# EAGLE board SparkFun_Venus_GPS_SMA_Connector_Panel_v21 (EAGLE 7.4.0), part 1 of 4
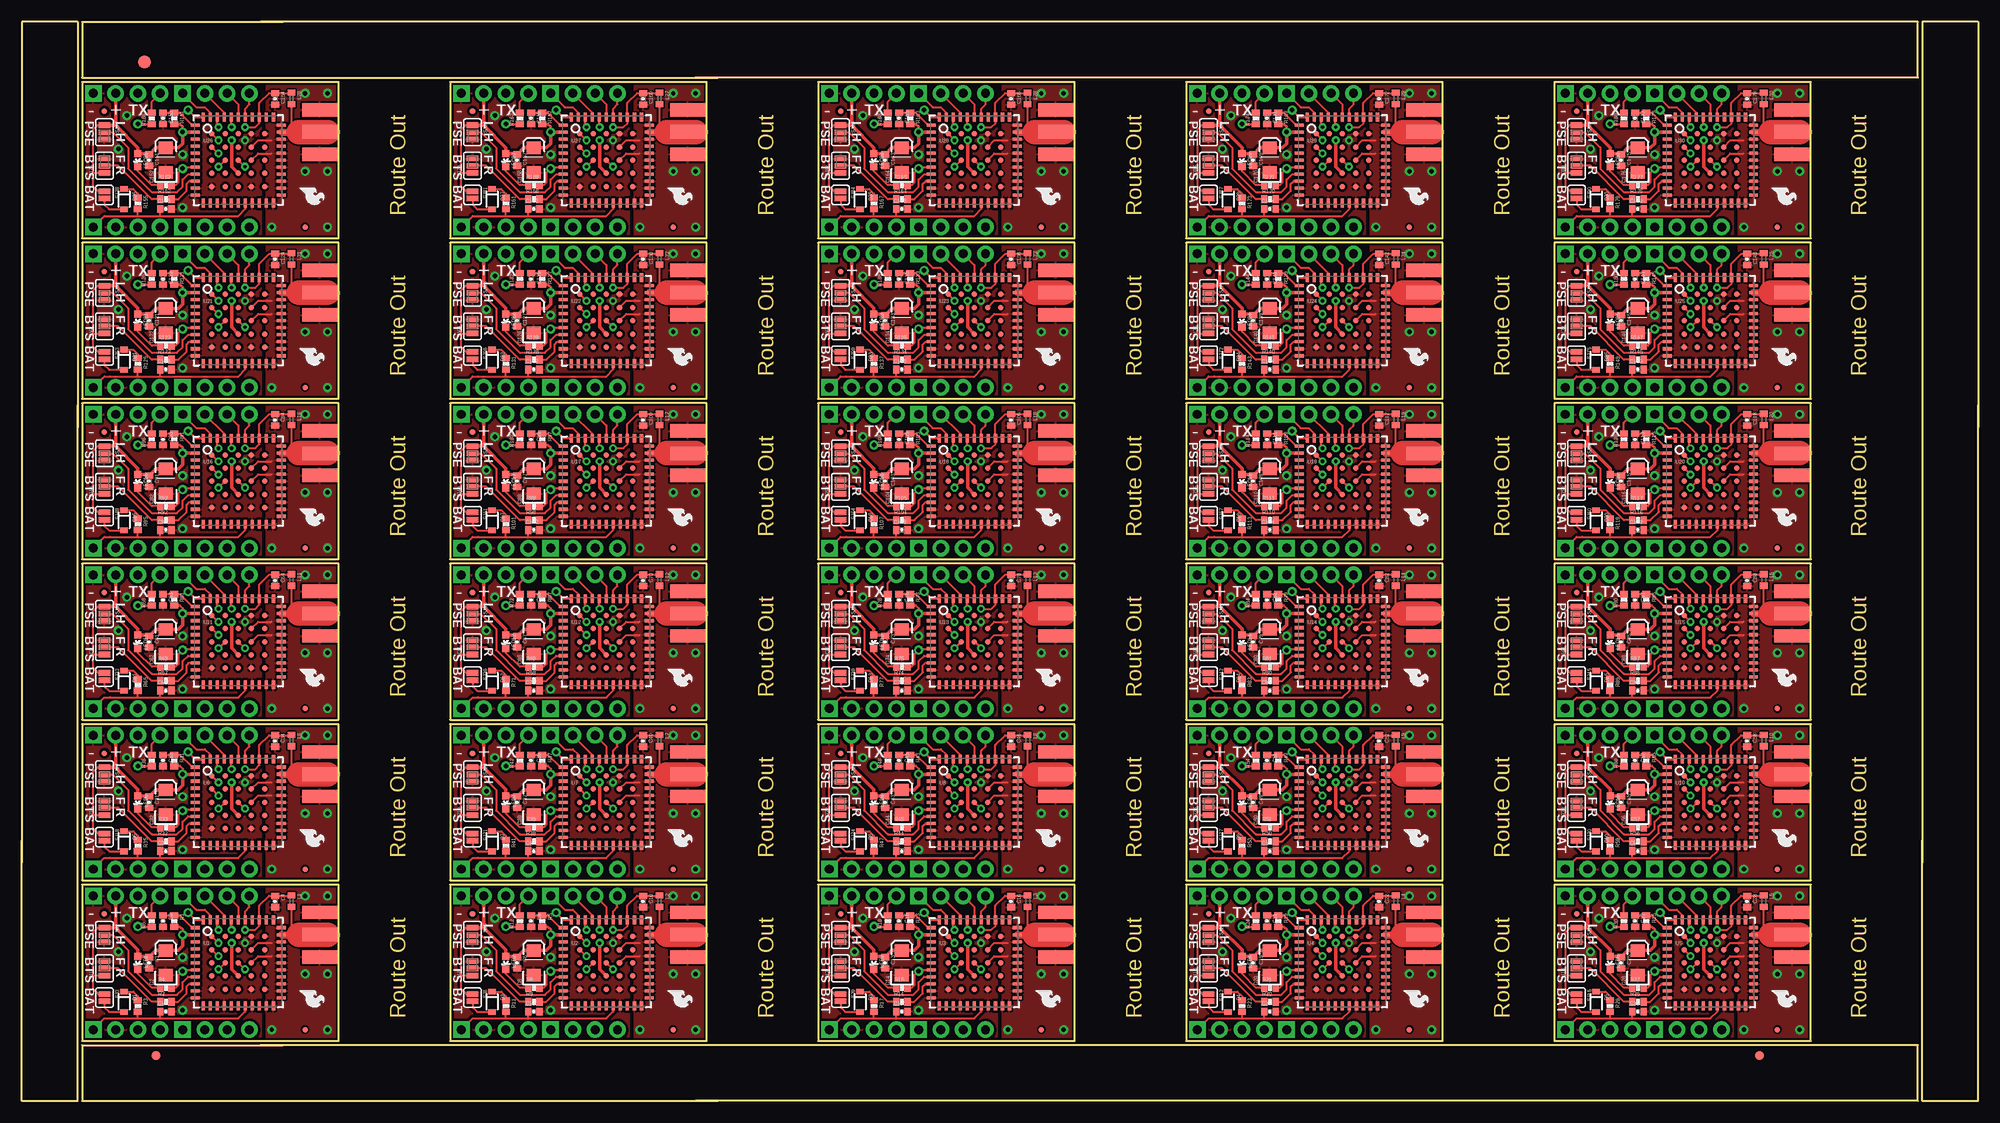
[diagram p0: board, top side]
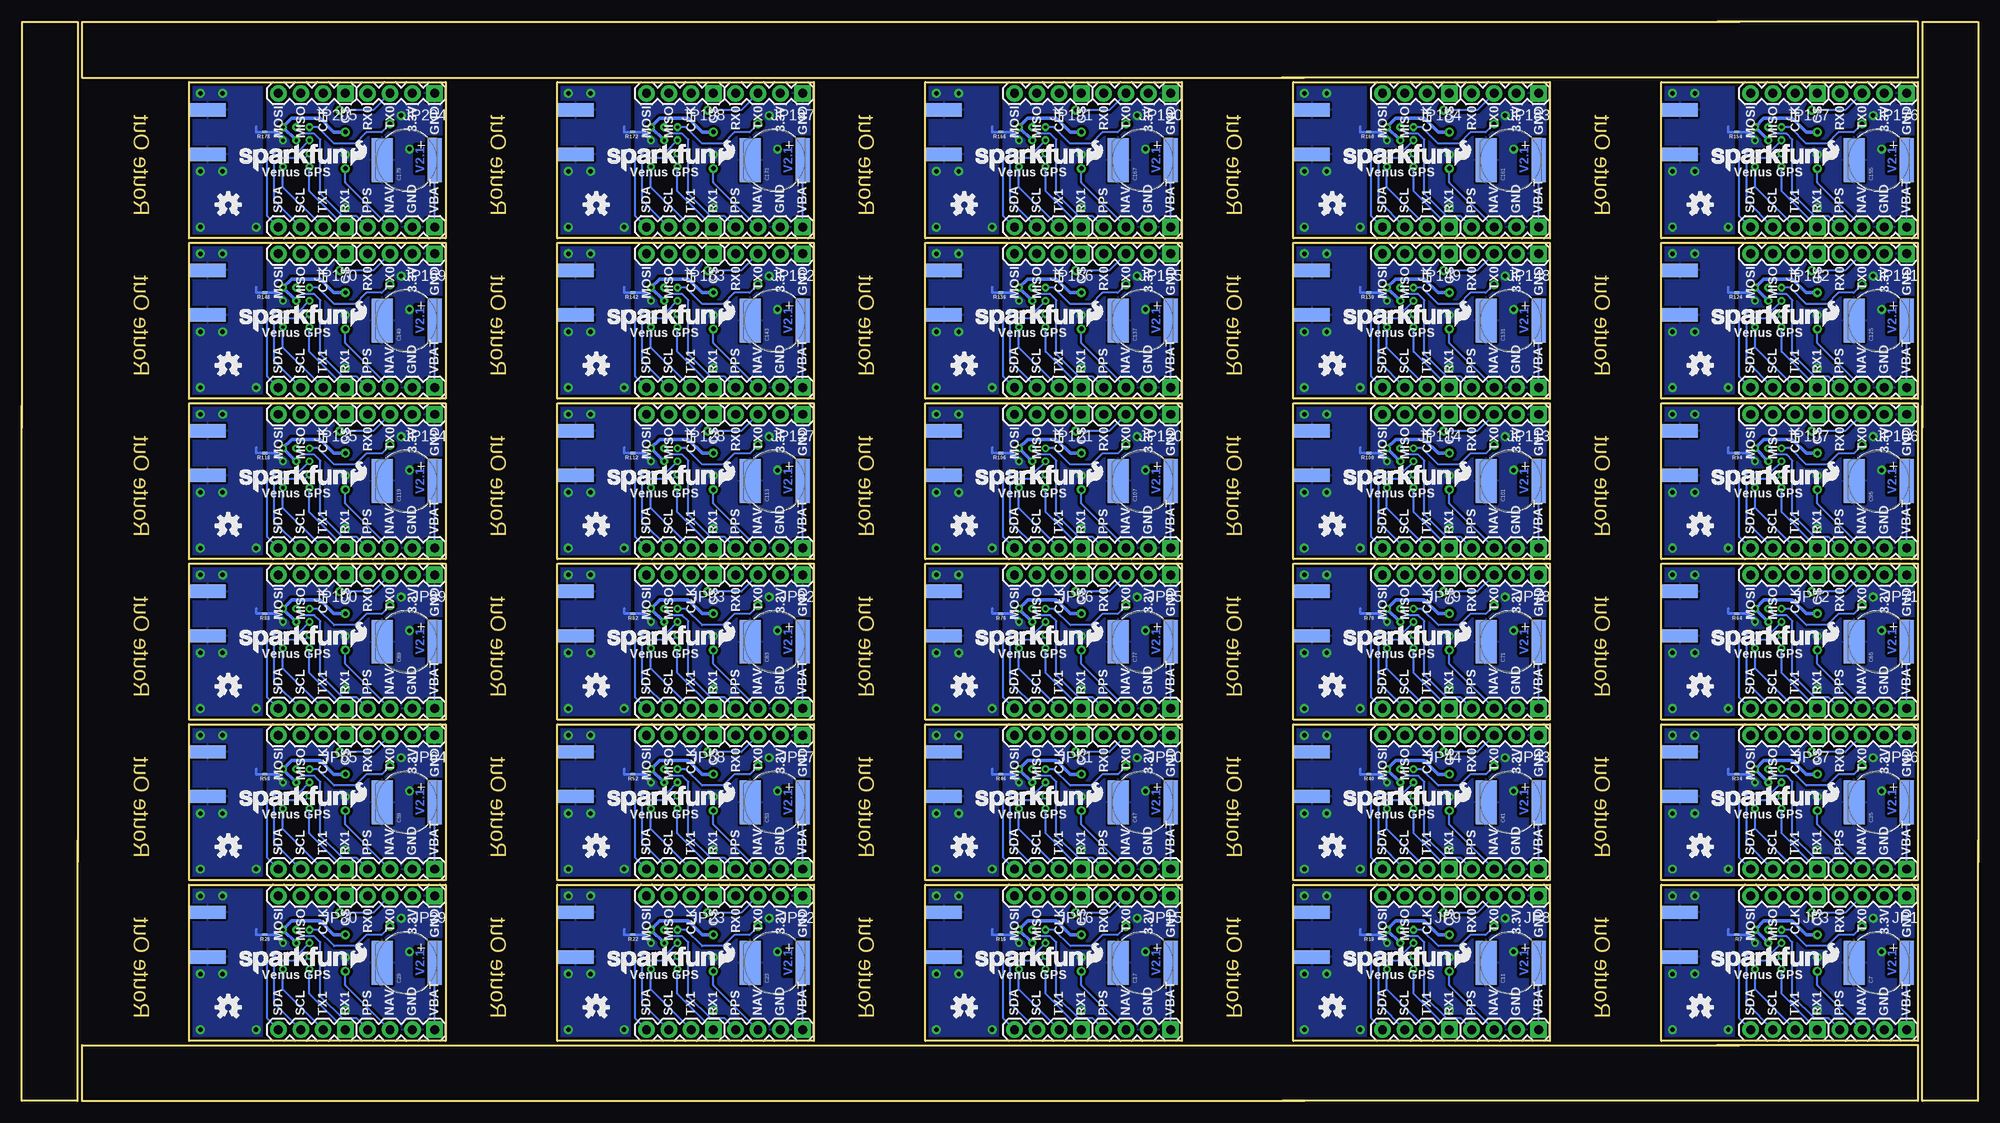
[diagram p1: board, bottom side, seen from below]

Size 222.76 x 122.94 mm. Coordinates in mm from the lower left corner, seen from the top.
Outline: 6.35,79.25 6.35,0 0,0 0,29.72
Outline: 0,27.18 0,122.94 6.35,122.94 6.35,76.71
Outline: 79.25,0 6.86,0 6.86,6.35 29.72,6.35
Outline: 27.18,6.35 215.9,6.35 215.9,0 76.71,0
Outline: 222.76,79.25 222.76,0 216.41,0 216.41,29.72
Outline: 216.41,27.18 216.41,122.94 222.76,122.94 222.76,76.71
Outline: 79.25,116.59 6.86,116.59 6.86,122.94 29.72,122.94
Outline: 27.18,122.94 215.9,122.94 215.9,116.59 76.71,116.59
Outline: 6.86,6.86 36.07,6.86 36.07,24.64 6.86,24.64 6.86,6.86
Outline: 48.77,6.86 77.98,6.86 77.98,24.64 48.77,24.64 48.77,6.86
Outline: 90.68,6.86 119.89,6.86 119.89,24.64 90.68,24.64 90.68,6.86
Outline: 132.59,6.86 161.8,6.86 161.8,24.64 132.59,24.64 132.59,6.86
Outline: 174.5,6.86 203.71,6.86 203.71,24.64 174.5,24.64 174.5,6.86
Outline: 6.86,25.15 36.07,25.15 36.07,42.93 6.86,42.93 6.86,25.15
Outline: 48.77,25.15 77.98,25.15 77.98,42.93 48.77,42.93 48.77,25.15
Outline: 90.68,25.15 119.89,25.15 119.89,42.93 90.68,42.93 90.68,25.15
Outline: 132.59,25.15 161.8,25.15 161.8,42.93 132.59,42.93 132.59,25.15
Outline: 174.5,25.15 203.71,25.15 203.71,42.93 174.5,42.93 174.5,25.15
Outline: 6.86,43.43 36.07,43.43 36.07,61.21 6.86,61.21 6.86,43.43
Outline: 48.77,43.43 77.98,43.43 77.98,61.21 48.77,61.21 48.77,43.43
Outline: 90.68,43.43 119.89,43.43 119.89,61.21 90.68,61.21 90.68,43.43
Outline: 132.59,43.43 161.8,43.43 161.8,61.21 132.59,61.21 132.59,43.43
Outline: 174.5,43.43 203.71,43.43 203.71,61.21 174.5,61.21 174.5,43.43
Outline: 6.86,61.72 36.07,61.72 36.07,79.5 6.86,79.5 6.86,61.72
Outline: 48.77,61.72 77.98,61.72 77.98,79.5 48.77,79.5 48.77,61.72
Outline: 90.68,61.72 119.89,61.72 119.89,79.5 90.68,79.5 90.68,61.72
Outline: 132.59,61.72 161.8,61.72 161.8,79.5 132.59,79.5 132.59,61.72
Outline: 174.5,61.72 203.71,61.72 203.71,79.5 174.5,79.5 174.5,61.72
Outline: 6.86,80.01 36.07,80.01 36.07,97.79 6.86,97.79 6.86,80.01
Outline: 48.77,80.01 77.98,80.01 77.98,97.79 48.77,97.79 48.77,80.01
Outline: 90.68,80.01 119.89,80.01 119.89,97.79 90.68,97.79 90.68,80.01
Outline: 132.59,80.01 161.8,80.01 161.8,97.79 132.59,97.79 132.59,80.01
Outline: 174.5,80.01 203.71,80.01 203.71,97.79 174.5,97.79 174.5,80.01
Outline: 6.86,98.3 36.07,98.3 36.07,116.08 6.86,116.08 6.86,98.3
Outline: 48.77,98.3 77.98,98.3 77.98,116.08 48.77,116.08 48.77,98.3
Outline: 90.68,98.3 119.89,98.3 119.89,116.08 90.68,116.08 90.68,98.3
Outline: 132.59,98.3 161.8,98.3 161.8,116.08 132.59,116.08 132.59,98.3
Outline: 174.5,98.3 203.71,98.3 203.71,116.08 174.5,116.08 174.5,98.3
Copper layers (1*16): Top 0.035mm / dielectric 1.5mm / Bottom 0.035mm
Design rules "SparkFun-2-layer": minimum track width 7mil, minimum drill 15mil, track to track 8mil, track to pad 8mil, pad to pad 8mil, via to via 8mil, smd to smd 8mil, copper to edge 8mil, drill to drill 8mil, minimum pad ring 12mil, minimum via ring 10mil, stop-mask expansion 4mil, vias tented up to drill 20mil, thermal gap 10mil

## Footprints (pad centres in the part's own frame; a part is rotated, then mirrored left to right if it is on the bottom)
0402-CAP = smd 0.7 x 0.9: 1 -0.65,0; 2 0.65,0
EIA3216 = smd 1.4 x 1.6: A 1.4,0; C -1.4,0
EN_J2 = smd 5 x 1.6: + 0,-3.2 | smd 5 x 2.4: - 0,2.8
SOD-323 = smd 0.63 x 0.83: 1 -1.15,0; 2 1.15,0
FIDUCIAL-1.5X3 = smd 1.5 x 1.5: 1 0,0
FIDUCIAL-1X2 = smd 1 x 1: 1 0,0
1X04 = drill 1.016 pad 1.88 square: 1 0,0 | drill 1.016 pad 1.88: 2 2.54,0; 3 5.08,0; 4 7.62,0
SMA-EDGE = smd 1.524 x 4.064: GND@0 0,0; GND@1 5.08,0; SIG 2.54,0 | smd 1.524 x 4.064 bottom: GND@2 0,0; GND@3 5.08,0
MICRO-FIDUCIAL = smd 0.635 x 0.635: 1 0,0
C0402 = smd 0.7 x 0.9: 1 -0.65,0; 2 0.65,0
LED-0603 = smd 0.8 x 0.8: A 0,-0.75; C 0,0.75
0402-RES = smd 0.7 x 0.9: 1 -0.65,0; 2 0.65,0
GND-JUMP = smd 0.305 x 0.305: 1 -0.133,0; 2 0.133,0
SJ_3_PASTE2&3 = smd 0.635 x 1.27: 1 -0.813,0; 2 0,0; 3 0.813,0
SJ_2S = smd 0.635 x 1.27: 1 -0.412,0; 2 0.412,0
VENUS638FLPX = smd 1 x 0.36: 1 -4.9,4; 2 -4.9,3.2; 3 -4.9,2.4; 4 -4.9,1.6; 5 -4.9,0.8; 6 -4.9,0; 7 -4.9,-0.8; 8 -4.9,-1.6; 9 -4.9,-2.4; 10 -4.9,-3.2; 11 -4.9,-4; 23 4.9,-4; 24 4.9,-3.2; 25 4.9,-2.4; 26 4.9,-1.6; 27 4.9,-0.8; 28 4.9,0; 29 4.9,0.8; 30 4.9,1.6; 31 4.9,2.4; 32 4.9,3.2; 33 4.9,4 | smd 0.36 x 1: 12 -4,-4.9; 13 -3.2,-4.9; 14 -2.4,-4.9; 15 -1.6,-4.9; 16 -0.8,-4.9; 17 0,-4.9; 18 0.8,-4.9; 19 1.6,-4.9; 20 2.4,-4.9; 21 3.2,-4.9; 22 4,-4.9; 34 4,4.9; 35 3.2,4.9; 36 2.4,4.9; 37 1.6,4.9; 38 0.8,4.9; 39 0,4.9; 40 -0.8,4.9; 41 -1.6,4.9; 42 -2.4,4.9; 43 -3.2,4.9; 44 -4,4.9 | smd 0.6 x 0.6: 45 -3,3; 46 -3,1.5; 47 -3,0; 48 -3,-1.5; 49 -3,-3; 50 -1.5,3; 51 -1.5,1.5; 52 -1.5,0; 53 -1.5,-1.5; 54 -1.5,-3; 55 0,3; 56 0,1.5; 57 0,0; 58 0,-1.5; 59 0,-3; 60 1.5,3; 61 1.5,1.5; 62 1.5,0; 63 1.5,-1.5; 64 1.5,-3; 65 3,3; 66 3,1.5; 67 3,0; 68 3,-1.5; 69 3,-3

## Placement (x,y rotation side)
C1  0.1uF  [0402-CAP]  14.48,15.75 270 top
C2  10uF  [EIA3216]  16.38,15.75 90 top
C3  1uF  [0402-CAP]  16.07,20.51 270 top
C4  22pF  [0402-CAP]  28.83,22.73 270 top
C5  0.1uF  [0402-CAP]  16.38,10.19 0 top
C6  0.1uF  [0402-CAP]  56.39,15.75 270 top
C7  DNP  [EN_J2]  11.3,15.75 90 bottom
C8  10uF  [EIA3216]  58.29,15.75 90 top
C9  1uF  [0402-CAP]  57.98,20.51 270 top
C10  22pF  [0402-CAP]  70.74,22.73 270 top
C11  DNP  [EN_J2]  53.21,15.75 90 bottom
C12  0.1uF  [0402-CAP]  58.29,10.19 0 top
C13  0.1uF  [0402-CAP]  98.3,15.75 270 top
C14  10uF  [EIA3216]  100.2,15.75 90 top
C15  1uF  [0402-CAP]  99.89,20.51 270 top
C16  22pF  [0402-CAP]  112.65,22.73 270 top
C17  DNP  [EN_J2]  95.12,15.75 90 bottom
C18  0.1uF  [0402-CAP]  100.2,10.19 0 top
C19  0.1uF  [0402-CAP]  140.21,15.75 270 top
C20  10uF  [EIA3216]  142.11,15.75 90 top
C21  1uF  [0402-CAP]  141.8,20.51 270 top
C22  22pF  [0402-CAP]  154.56,22.73 270 top
C23  DNP  [EN_J2]  137.03,15.75 90 bottom
C24  0.1uF  [0402-CAP]  142.11,10.19 0 top
C25  0.1uF  [0402-CAP]  182.12,15.75 270 top
C26  10uF  [EIA3216]  184.02,15.75 90 top
C27  1uF  [0402-CAP]  183.71,20.51 270 top
C28  22pF  [0402-CAP]  196.47,22.73 270 top
C29  DNP  [EN_J2]  178.94,15.75 90 bottom
C30  0.1uF  [0402-CAP]  184.02,10.19 0 top
C31  0.1uF  [0402-CAP]  14.48,34.04 270 top
C32  10uF  [EIA3216]  16.38,34.04 90 top
C33  1uF  [0402-CAP]  16.07,38.8 270 top
C34  22pF  [0402-CAP]  28.83,41.02 270 top
C35  DNP  [EN_J2]  11.3,34.04 90 bottom
C36  0.1uF  [0402-CAP]  16.38,28.48 0 top
C37  0.1uF  [0402-CAP]  56.39,34.04 270 top
C38  10uF  [EIA3216]  58.29,34.04 90 top
C39  1uF  [0402-CAP]  57.98,38.8 270 top
C40  22pF  [0402-CAP]  70.74,41.02 270 top
C41  DNP  [EN_J2]  53.21,34.04 90 bottom
C42  0.1uF  [0402-CAP]  58.29,28.48 0 top
C43  0.1uF  [0402-CAP]  98.3,34.04 270 top
C44  10uF  [EIA3216]  100.2,34.04 90 top
C45  1uF  [0402-CAP]  99.89,38.8 270 top
C46  22pF  [0402-CAP]  112.65,41.02 270 top
C47  DNP  [EN_J2]  95.12,34.04 90 bottom
C48  0.1uF  [0402-CAP]  100.2,28.48 0 top
C49  0.1uF  [0402-CAP]  140.21,34.04 270 top
C50  10uF  [EIA3216]  142.11,34.04 90 top
C51  1uF  [0402-CAP]  141.8,38.8 270 top
C52  22pF  [0402-CAP]  154.56,41.02 270 top
C53  DNP  [EN_J2]  137.03,34.04 90 bottom
C54  0.1uF  [0402-CAP]  142.11,28.48 0 top
C55  0.1uF  [0402-CAP]  182.12,34.04 270 top
C56  10uF  [EIA3216]  184.02,34.04 90 top
C57  1uF  [0402-CAP]  183.71,38.8 270 top
C58  22pF  [0402-CAP]  196.47,41.02 270 top
C59  DNP  [EN_J2]  178.94,34.04 90 bottom
C60  0.1uF  [0402-CAP]  184.02,28.48 0 top
C61  0.1uF  [0402-CAP]  14.48,52.32 270 top
C62  10uF  [EIA3216]  16.38,52.32 90 top
C63  1uF  [0402-CAP]  16.07,57.09 270 top
C64  22pF  [0402-CAP]  28.83,59.31 270 top
C65  DNP  [EN_J2]  11.3,52.32 90 bottom
C66  0.1uF  [0402-CAP]  16.38,46.77 0 top
C67  0.1uF  [0402-CAP]  56.39,52.32 270 top
C68  10uF  [EIA3216]  58.29,52.32 90 top
C69  1uF  [0402-CAP]  57.98,57.09 270 top
C70  22pF  [0402-CAP]  70.74,59.31 270 top
C71  DNP  [EN_J2]  53.21,52.32 90 bottom
C72  0.1uF  [0402-CAP]  58.29,46.77 0 top
C73  0.1uF  [0402-CAP]  98.3,52.32 270 top
C74  10uF  [EIA3216]  100.2,52.32 90 top
C75  1uF  [0402-CAP]  99.89,57.09 270 top
C76  22pF  [0402-CAP]  112.65,59.31 270 top
C77  DNP  [EN_J2]  95.12,52.32 90 bottom
C78  0.1uF  [0402-CAP]  100.2,46.77 0 top
C79  0.1uF  [0402-CAP]  140.21,52.32 270 top
C80  10uF  [EIA3216]  142.11,52.32 90 top
C81  1uF  [0402-CAP]  141.8,57.09 270 top
C82  22pF  [0402-CAP]  154.56,59.31 270 top
C83  DNP  [EN_J2]  137.03,52.32 90 bottom
C84  0.1uF  [0402-CAP]  142.11,46.77 0 top
C85  0.1uF  [0402-CAP]  182.12,52.32 270 top
C86  10uF  [EIA3216]  184.02,52.32 90 top
C87  1uF  [0402-CAP]  183.71,57.09 270 top
C88  22pF  [0402-CAP]  196.47,59.31 270 top
C89  DNP  [EN_J2]  178.94,52.32 90 bottom
C90  0.1uF  [0402-CAP]  184.02,46.77 0 top
C91  0.1uF  [0402-CAP]  14.48,70.61 270 top
C92  10uF  [EIA3216]  16.38,70.61 90 top
C93  1uF  [0402-CAP]  16.07,75.37 270 top
C94  22pF  [0402-CAP]  28.83,77.6 270 top
C95  DNP  [EN_J2]  11.3,70.61 90 bottom
C96  0.1uF  [0402-CAP]  16.38,65.06 0 top
C97  0.1uF  [0402-CAP]  56.39,70.61 270 top
C98  10uF  [EIA3216]  58.29,70.61 90 top
C99  1uF  [0402-CAP]  57.98,75.37 270 top
C100  22pF  [0402-CAP]  70.74,77.6 270 top
C101  DNP  [EN_J2]  53.21,70.61 90 bottom
C102  0.1uF  [0402-CAP]  58.29,65.06 0 top
C103  0.1uF  [0402-CAP]  98.3,70.61 270 top
C104  10uF  [EIA3216]  100.2,70.61 90 top
C105  1uF  [0402-CAP]  99.89,75.37 270 top
C106  22pF  [0402-CAP]  112.65,77.6 270 top
C107  DNP  [EN_J2]  95.12,70.61 90 bottom
C108  0.1uF  [0402-CAP]  100.2,65.06 0 top
C109  0.1uF  [0402-CAP]  140.21,70.61 270 top
C110  10uF  [EIA3216]  142.11,70.61 90 top
C111  1uF  [0402-CAP]  141.8,75.37 270 top
C112  22pF  [0402-CAP]  154.56,77.6 270 top
C113  DNP  [EN_J2]  137.03,70.61 90 bottom
C114  0.1uF  [0402-CAP]  142.11,65.06 0 top
C115  0.1uF  [0402-CAP]  182.12,70.61 270 top
C116  10uF  [EIA3216]  184.02,70.61 90 top
C117  1uF  [0402-CAP]  183.71,75.37 270 top
C118  22pF  [0402-CAP]  196.47,77.6 270 top
C119  DNP  [EN_J2]  178.94,70.61 90 bottom
C120  0.1uF  [0402-CAP]  184.02,65.06 0 top
C121  0.1uF  [0402-CAP]  14.48,88.9 270 top
C122  10uF  [EIA3216]  16.38,88.9 90 top
C123  1uF  [0402-CAP]  16.07,93.66 270 top
C124  22pF  [0402-CAP]  28.83,95.89 270 top
C125  DNP  [EN_J2]  11.3,88.9 90 bottom
C126  0.1uF  [0402-CAP]  16.38,83.34 0 top
C127  0.1uF  [0402-CAP]  56.39,88.9 270 top
C128  10uF  [EIA3216]  58.29,88.9 90 top
C129  1uF  [0402-CAP]  57.98,93.66 270 top
C130  22pF  [0402-CAP]  70.74,95.89 270 top
C131  DNP  [EN_J2]  53.21,88.9 90 bottom
C132  0.1uF  [0402-CAP]  58.29,83.34 0 top
C133  0.1uF  [0402-CAP]  98.3,88.9 270 top
C134  10uF  [EIA3216]  100.2,88.9 90 top
C135  1uF  [0402-CAP]  99.89,93.66 270 top
C136  22pF  [0402-CAP]  112.65,95.89 270 top
C137  DNP  [EN_J2]  95.12,88.9 90 bottom
C138  0.1uF  [0402-CAP]  100.2,83.34 0 top
C139  0.1uF  [0402-CAP]  140.21,88.9 270 top
C140  10uF  [EIA3216]  142.11,88.9 90 top
C141  1uF  [0402-CAP]  141.8,93.66 270 top
C142  22pF  [0402-CAP]  154.56,95.89 270 top
C143  DNP  [EN_J2]  137.03,88.9 90 bottom
C144  0.1uF  [0402-CAP]  142.11,83.34 0 top
C145  0.1uF  [0402-CAP]  182.12,88.9 270 top
C146  10uF  [EIA3216]  184.02,88.9 90 top
C147  1uF  [0402-CAP]  183.71,93.66 270 top
C148  22pF  [0402-CAP]  196.47,95.89 270 top
C149  DNP  [EN_J2]  178.94,88.9 90 bottom
C150  0.1uF  [0402-CAP]  184.02,83.34 0 top
C151  0.1uF  [0402-CAP]  14.48,107.19 270 top
C152  10uF  [EIA3216]  16.38,107.19 90 top
C153  1uF  [0402-CAP]  16.07,111.95 270 top
C154  22pF  [0402-CAP]  28.83,114.17 270 top
C155  DNP  [EN_J2]  11.3,107.19 90 bottom
C156  0.1uF  [0402-CAP]  16.38,101.63 0 top
C157  0.1uF  [0402-CAP]  56.39,107.19 270 top
C158  10uF  [EIA3216]  58.29,107.19 90 top
C159  1uF  [0402-CAP]  57.98,111.95 270 top
C160  22pF  [0402-CAP]  70.74,114.17 270 top
C161  DNP  [EN_J2]  53.21,107.19 90 bottom
C162  0.1uF  [0402-CAP]  58.29,101.63 0 top
C163  0.1uF  [0402-CAP]  98.3,107.19 270 top
C164  10uF  [EIA3216]  100.2,107.19 90 top
C165  1uF  [0402-CAP]  99.89,111.95 270 top
C166  22pF  [0402-CAP]  112.65,114.17 270 top
C167  DNP  [EN_J2]  95.12,107.19 90 bottom
C168  0.1uF  [0402-CAP]  100.2,101.63 0 top
C169  0.1uF  [0402-CAP]  140.21,107.19 270 top
C170  10uF  [EIA3216]  142.11,107.19 90 top
C171  1uF  [0402-CAP]  141.8,111.95 270 top
C172  22pF  [0402-CAP]  154.56,114.17 270 top
C173  DNP  [EN_J2]  137.03,107.19 90 bottom
C174  0.1uF  [0402-CAP]  142.11,101.63 0 top
C175  0.1uF  [0402-CAP]  182.12,107.19 270 top
C176  10uF  [EIA3216]  184.02,107.19 90 top
C177  1uF  [0402-CAP]  183.71,111.95 270 top
C178  22pF  [0402-CAP]  196.47,114.17 270 top
C179  DNP  [EN_J2]  178.94,107.19 90 bottom
C180  0.1uF  [0402-CAP]  184.02,101.63 0 top
D1  BAS16  [SOD-323]  11.62,11.3 270 top
D2  BAS16  [SOD-323]  53.53,11.3 270 top
D3  BAS16  [SOD-323]  95.44,11.3 270 top
D4  BAS16  [SOD-323]  137.35,11.3 270 top
D5  BAS16  [SOD-323]  179.26,11.3 270 top
D6  BAS16  [SOD-323]  11.62,29.59 270 top
D7  BAS16  [SOD-323]  53.53,29.59 270 top
D8  BAS16  [SOD-323]  95.44,29.59 270 top
D9  BAS16  [SOD-323]  137.35,29.59 270 top
D10  BAS16  [SOD-323]  179.26,29.59 270 top
D11  BAS16  [SOD-323]  11.62,47.88 270 top
D12  BAS16  [SOD-323]  53.53,47.88 270 top
D13  BAS16  [SOD-323]  95.44,47.88 270 top
D14  BAS16  [SOD-323]  137.35,47.88 270 top
D15  BAS16  [SOD-323]  179.26,47.88 270 top
D16  BAS16  [SOD-323]  11.62,66.17 270 top
D17  BAS16  [SOD-323]  53.53,66.17 270 top
D18  BAS16  [SOD-323]  95.44,66.17 270 top
D19  BAS16  [SOD-323]  137.35,66.17 270 top
D20  BAS16  [SOD-323]  179.26,66.17 270 top
D21  BAS16  [SOD-323]  11.62,84.45 270 top
D22  BAS16  [SOD-323]  53.53,84.45 270 top
D23  BAS16  [SOD-323]  95.44,84.45 270 top
D24  BAS16  [SOD-323]  137.35,84.45 270 top
D25  BAS16  [SOD-323]  179.26,84.45 270 top
D26  BAS16  [SOD-323]  11.62,102.74 270 top
D27  BAS16  [SOD-323]  53.53,102.74 270 top
D28  BAS16  [SOD-323]  95.44,102.74 270 top
D29  BAS16  [SOD-323]  137.35,102.74 270 top
D30  BAS16  [SOD-323]  179.26,102.74 270 top
E$1  [FIDUCIAL-1.5X3]  13.97,118.36 0 top
E$3  [FIDUCIAL-1X2]  15.24,5.21 270 top
E$4  [FIDUCIAL-1X2]  197.87,5.21 90 top
JP1  MAIN  [1X04]  8.13,23.37 180 bottom
JP2  MISC  [1X04]  8.13,8.13 180 bottom
JP3  SPI  [1X04]  18.29,23.37 180 bottom
JP4  AUX  [1X04]  18.29,8.13 180 bottom
JP5  SMA_EDGE  [SMA-EDGE]  33.93,16.41 90 top
JP6  FIDUCIALUFIDUCIAL  [MICRO-FIDUCIAL]  32.26,8.13 0 top
JP7  FIDUCIALUFIDUCIAL  [MICRO-FIDUCIAL]  9.4,21.34 0 top
JP8  MAIN  [1X04]  50.04,23.37 180 bottom
JP9  SPI  [1X04]  60.2,23.37 180 bottom
JP10  SMA_EDGE  [SMA-EDGE]  75.84,16.41 90 top
JP11  AUX  [1X04]  60.2,8.13 180 bottom
JP12  MISC  [1X04]  50.04,8.13 180 bottom
JP13  FIDUCIALUFIDUCIAL  [MICRO-FIDUCIAL]  74.17,8.13 0 top
JP14  FIDUCIALUFIDUCIAL  [MICRO-FIDUCIAL]  51.31,21.34 0 top
JP15  MAIN  [1X04]  91.95,23.37 180 bottom
JP16  SPI  [1X04]  102.11,23.37 180 bottom
JP17  SMA_EDGE  [SMA-EDGE]  117.75,16.41 90 top
JP18  AUX  [1X04]  102.11,8.13 180 bottom
JP19  MISC  [1X04]  91.95,8.13 180 bottom
JP20  FIDUCIALUFIDUCIAL  [MICRO-FIDUCIAL]  116.08,8.13 0 top
JP21  FIDUCIALUFIDUCIAL  [MICRO-FIDUCIAL]  93.22,21.34 0 top
JP22  MAIN  [1X04]  133.86,23.37 180 bottom
JP23  SPI  [1X04]  144.02,23.37 180 bottom
JP24  SMA_EDGE  [SMA-EDGE]  159.66,16.41 90 top
JP25  AUX  [1X04]  144.02,8.13 180 bottom
JP26  MISC  [1X04]  133.86,8.13 180 bottom
JP27  FIDUCIALUFIDUCIAL  [MICRO-FIDUCIAL]  157.99,8.13 0 top
JP28  FIDUCIALUFIDUCIAL  [MICRO-FIDUCIAL]  135.13,21.34 0 top
JP29  MAIN  [1X04]  175.77,23.37 180 bottom
JP30  SPI  [1X04]  185.93,23.37 180 bottom
JP31  SMA_EDGE  [SMA-EDGE]  201.57,16.41 90 top
JP32  AUX  [1X04]  185.93,8.13 180 bottom
JP33  MISC  [1X04]  175.77,8.13 180 bottom
JP34  FIDUCIALUFIDUCIAL  [MICRO-FIDUCIAL]  199.9,8.13 0 top
JP35  FIDUCIALUFIDUCIAL  [MICRO-FIDUCIAL]  177.04,21.34 0 top
JP36  MAIN  [1X04]  8.13,41.66 180 bottom
JP37  SPI  [1X04]  18.29,41.66 180 bottom
JP38  SMA_EDGE  [SMA-EDGE]  33.93,34.7 90 top
JP39  AUX  [1X04]  18.29,26.42 180 bottom
JP40  MISC  [1X04]  8.13,26.42 180 bottom
JP41  FIDUCIALUFIDUCIAL  [MICRO-FIDUCIAL]  32.26,26.42 0 top
JP42  FIDUCIALUFIDUCIAL  [MICRO-FIDUCIAL]  9.4,39.62 0 top
JP43  MAIN  [1X04]  50.04,41.66 180 bottom
JP44  SPI  [1X04]  60.2,41.66 180 bottom
JP45  SMA_EDGE  [SMA-EDGE]  75.84,34.7 90 top
JP46  AUX  [1X04]  60.2,26.42 180 bottom
JP47  MISC  [1X04]  50.04,26.42 180 bottom
JP48  FIDUCIALUFIDUCIAL  [MICRO-FIDUCIAL]  74.17,26.42 0 top
JP49  FIDUCIALUFIDUCIAL  [MICRO-FIDUCIAL]  51.31,39.62 0 top
JP50  MAIN  [1X04]  91.95,41.66 180 bottom
JP51  SPI  [1X04]  102.11,41.66 180 bottom
JP52  SMA_EDGE  [SMA-EDGE]  117.75,34.7 90 top
JP53  AUX  [1X04]  102.11,26.42 180 bottom
JP54  MISC  [1X04]  91.95,26.42 180 bottom
JP55  FIDUCIALUFIDUCIAL  [MICRO-FIDUCIAL]  116.08,26.42 0 top
JP56  FIDUCIALUFIDUCIAL  [MICRO-FIDUCIAL]  93.22,39.62 0 top
JP57  MAIN  [1X04]  133.86,41.66 180 bottom
JP58  SPI  [1X04]  144.02,41.66 180 bottom
JP59  SMA_EDGE  [SMA-EDGE]  159.66,34.7 90 top
JP60  AUX  [1X04]  144.02,26.42 180 bottom
JP61  MISC  [1X04]  133.86,26.42 180 bottom
JP62  FIDUCIALUFIDUCIAL  [MICRO-FIDUCIAL]  157.99,26.42 0 top
JP63  FIDUCIALUFIDUCIAL  [MICRO-FIDUCIAL]  135.13,39.62 0 top
JP64  MAIN  [1X04]  175.77,41.66 180 bottom
JP65  SPI  [1X04]  185.93,41.66 180 bottom
JP66  SMA_EDGE  [SMA-EDGE]  201.57,34.7 90 top
JP67  AUX  [1X04]  185.93,26.42 180 bottom
JP68  MISC  [1X04]  175.77,26.42 180 bottom
JP69  FIDUCIALUFIDUCIAL  [MICRO-FIDUCIAL]  199.9,26.42 0 top
JP70  FIDUCIALUFIDUCIAL  [MICRO-FIDUCIAL]  177.04,39.62 0 top
JP71  MAIN  [1X04]  8.13,59.94 180 bottom
JP72  SPI  [1X04]  18.29,59.94 180 bottom
JP73  SMA_EDGE  [SMA-EDGE]  33.93,52.98 90 top
JP74  AUX  [1X04]  18.29,44.7 180 bottom
JP75  MISC  [1X04]  8.13,44.7 180 bottom
JP76  FIDUCIALUFIDUCIAL  [MICRO-FIDUCIAL]  32.26,44.7 0 top
JP77  FIDUCIALUFIDUCIAL  [MICRO-FIDUCIAL]  9.4,57.91 0 top
JP78  MAIN  [1X04]  50.04,59.94 180 bottom
JP79  SPI  [1X04]  60.2,59.94 180 bottom
JP80  SMA_EDGE  [SMA-EDGE]  75.84,52.98 90 top
JP81  AUX  [1X04]  60.2,44.7 180 bottom
JP82  MISC  [1X04]  50.04,44.7 180 bottom
JP83  FIDUCIALUFIDUCIAL  [MICRO-FIDUCIAL]  74.17,44.7 0 top
JP84  FIDUCIALUFIDUCIAL  [MICRO-FIDUCIAL]  51.31,57.91 0 top
JP85  MAIN  [1X04]  91.95,59.94 180 bottom
JP86  SPI  [1X04]  102.11,59.94 180 bottom
JP87  SMA_EDGE  [SMA-EDGE]  117.75,52.98 90 top
JP88  AUX  [1X04]  102.11,44.7 180 bottom
JP89  MISC  [1X04]  91.95,44.7 180 bottom
JP90  FIDUCIALUFIDUCIAL  [MICRO-FIDUCIAL]  116.08,44.7 0 top
JP91  FIDUCIALUFIDUCIAL  [MICRO-FIDUCIAL]  93.22,57.91 0 top
JP92  MAIN  [1X04]  133.86,59.94 180 bottom
JP93  SPI  [1X04]  144.02,59.94 180 bottom
JP94  SMA_EDGE  [SMA-EDGE]  159.66,52.98 90 top
JP95  AUX  [1X04]  144.02,44.7 180 bottom
JP96  MISC  [1X04]  133.86,44.7 180 bottom
JP97  FIDUCIALUFIDUCIAL  [MICRO-FIDUCIAL]  157.99,44.7 0 top
JP98  FIDUCIALUFIDUCIAL  [MICRO-FIDUCIAL]  135.13,57.91 0 top
JP99  MAIN  [1X04]  175.77,59.94 180 bottom
JP100  SPI  [1X04]  185.93,59.94 180 bottom
JP101  SMA_EDGE  [SMA-EDGE]  201.57,52.98 90 top
JP102  AUX  [1X04]  185.93,44.7 180 bottom
JP103  MISC  [1X04]  175.77,44.7 180 bottom
JP104  FIDUCIALUFIDUCIAL  [MICRO-FIDUCIAL]  199.9,44.7 0 top
JP105  FIDUCIALUFIDUCIAL  [MICRO-FIDUCIAL]  177.04,57.91 0 top
JP106  MAIN  [1X04]  8.13,78.23 180 bottom
JP107  SPI  [1X04]  18.29,78.23 180 bottom
JP108  SMA_EDGE  [SMA-EDGE]  33.93,71.27 90 top
JP109  AUX  [1X04]  18.29,62.99 180 bottom
JP110  MISC  [1X04]  8.13,62.99 180 bottom
JP111  FIDUCIALUFIDUCIAL  [MICRO-FIDUCIAL]  32.26,62.99 0 top
JP112  FIDUCIALUFIDUCIAL  [MICRO-FIDUCIAL]  9.4,76.2 0 top
JP113  MAIN  [1X04]  50.04,78.23 180 bottom
JP114  SPI  [1X04]  60.2,78.23 180 bottom
JP115  SMA_EDGE  [SMA-EDGE]  75.84,71.27 90 top
JP116  AUX  [1X04]  60.2,62.99 180 bottom
JP117  MISC  [1X04]  50.04,62.99 180 bottom
JP118  FIDUCIALUFIDUCIAL  [MICRO-FIDUCIAL]  74.17,62.99 0 top
JP119  FIDUCIALUFIDUCIAL  [MICRO-FIDUCIAL]  51.31,76.2 0 top
JP120  MAIN  [1X04]  91.95,78.23 180 bottom
JP121  SPI  [1X04]  102.11,78.23 180 bottom
JP122  SMA_EDGE  [SMA-EDGE]  117.75,71.27 90 top
JP123  AUX  [1X04]  102.11,62.99 180 bottom
JP124  MISC  [1X04]  91.95,62.99 180 bottom
JP125  FIDUCIALUFIDUCIAL  [MICRO-FIDUCIAL]  116.08,62.99 0 top
JP126  FIDUCIALUFIDUCIAL  [MICRO-FIDUCIAL]  93.22,76.2 0 top
JP127  MAIN  [1X04]  133.86,78.23 180 bottom
JP128  SPI  [1X04]  144.02,78.23 180 bottom
JP129  SMA_EDGE  [SMA-EDGE]  159.66,71.27 90 top
JP130  AUX  [1X04]  144.02,62.99 180 bottom
JP131  MISC  [1X04]  133.86,62.99 180 bottom
JP132  FIDUCIALUFIDUCIAL  [MICRO-FIDUCIAL]  157.99,62.99 0 top
JP133  FIDUCIALUFIDUCIAL  [MICRO-FIDUCIAL]  135.13,76.2 0 top
JP134  MAIN  [1X04]  175.77,78.23 180 bottom
JP135  SPI  [1X04]  185.93,78.23 180 bottom
JP136  SMA_EDGE  [SMA-EDGE]  201.57,71.27 90 top
JP137  AUX  [1X04]  185.93,62.99 180 bottom
JP138  MISC  [1X04]  175.77,62.99 180 bottom
JP139  FIDUCIALUFIDUCIAL  [MICRO-FIDUCIAL]  199.9,62.99 0 top
JP140  FIDUCIALUFIDUCIAL  [MICRO-FIDUCIAL]  177.04,76.2 0 top
JP141  MAIN  [1X04]  8.13,96.52 180 bottom
JP142  SPI  [1X04]  18.29,96.52 180 bottom
JP143  SMA_EDGE  [SMA-EDGE]  33.93,89.56 90 top
JP144  AUX  [1X04]  18.29,81.28 180 bottom
JP145  MISC  [1X04]  8.13,81.28 180 bottom
JP146  FIDUCIALUFIDUCIAL  [MICRO-FIDUCIAL]  32.26,81.28 0 top
JP147  FIDUCIALUFIDUCIAL  [MICRO-FIDUCIAL]  9.4,94.49 0 top
JP148  MAIN  [1X04]  50.04,96.52 180 bottom
JP149  SPI  [1X04]  60.2,96.52 180 bottom
JP150  SMA_EDGE  [SMA-EDGE]  75.84,89.56 90 top
JP151  AUX  [1X04]  60.2,81.28 180 bottom
JP152  MISC  [1X04]  50.04,81.28 180 bottom
JP153  FIDUCIALUFIDUCIAL  [MICRO-FIDUCIAL]  74.17,81.28 0 top
JP154  FIDUCIALUFIDUCIAL  [MICRO-FIDUCIAL]  51.31,94.49 0 top
JP155  MAIN  [1X04]  91.95,96.52 180 bottom
JP156  SPI  [1X04]  102.11,96.52 180 bottom
JP157  SMA_EDGE  [SMA-EDGE]  117.75,89.56 90 top
JP158  AUX  [1X04]  102.11,81.28 180 bottom
JP159  MISC  [1X04]  91.95,81.28 180 bottom
JP160  FIDUCIALUFIDUCIAL  [MICRO-FIDUCIAL]  116.08,81.28 0 top
JP161  FIDUCIALUFIDUCIAL  [MICRO-FIDUCIAL]  93.22,94.49 0 top
JP162  MAIN  [1X04]  133.86,96.52 180 bottom
JP163  SPI  [1X04]  144.02,96.52 180 bottom
JP164  SMA_EDGE  [SMA-EDGE]  159.66,89.56 90 top
JP165  AUX  [1X04]  144.02,81.28 180 bottom
JP166  MISC  [1X04]  133.86,81.28 180 bottom
JP167  FIDUCIALUFIDUCIAL  [MICRO-FIDUCIAL]  157.99,81.28 0 top
JP168  FIDUCIALUFIDUCIAL  [MICRO-FIDUCIAL]  135.13,94.49 0 top
JP169  MAIN  [1X04]  175.77,96.52 180 bottom
JP170  SPI  [1X04]  185.93,96.52 180 bottom
JP171  SMA_EDGE  [SMA-EDGE]  201.57,89.56 90 top
JP172  AUX  [1X04]  185.93,81.28 180 bottom
JP173  MISC  [1X04]  175.77,81.28 180 bottom
JP174  FIDUCIALUFIDUCIAL  [MICRO-FIDUCIAL]  199.9,81.28 0 top
JP175  FIDUCIALUFIDUCIAL  [MICRO-FIDUCIAL]  177.04,94.49 0 top
JP176  MAIN  [1X04]  8.13,114.81 180 bottom
JP177  SPI  [1X04]  18.29,114.81 180 bottom
JP178  SMA_EDGE  [SMA-EDGE]  33.93,107.85 90 top
JP179  AUX  [1X04]  18.29,99.57 180 bottom
JP180  MISC  [1X04]  8.13,99.57 180 bottom
JP181  FIDUCIALUFIDUCIAL  [MICRO-FIDUCIAL]  32.26,99.57 0 top
JP182  FIDUCIALUFIDUCIAL  [MICRO-FIDUCIAL]  9.4,112.78 0 top
JP183  MAIN  [1X04]  50.04,114.81 180 bottom
JP184  SPI  [1X04]  60.2,114.81 180 bottom
JP185  SMA_EDGE  [SMA-EDGE]  75.84,107.85 90 top
JP186  AUX  [1X04]  60.2,99.57 180 bottom
JP187  MISC  [1X04]  50.04,99.57 180 bottom
JP188  FIDUCIALUFIDUCIAL  [MICRO-FIDUCIAL]  74.17,99.57 0 top
JP189  FIDUCIALUFIDUCIAL  [MICRO-FIDUCIAL]  51.31,112.78 0 top
JP190  MAIN  [1X04]  91.95,114.81 180 bottom
JP191  SPI  [1X04]  102.11,114.81 180 bottom
JP192  SMA_EDGE  [SMA-EDGE]  117.75,107.85 90 top
JP193  AUX  [1X04]  102.11,99.57 180 bottom
JP194  MISC  [1X04]  91.95,99.57 180 bottom
JP195  FIDUCIALUFIDUCIAL  [MICRO-FIDUCIAL]  116.08,99.57 0 top
JP196  FIDUCIALUFIDUCIAL  [MICRO-FIDUCIAL]  93.22,112.78 0 top
JP197  MAIN  [1X04]  133.86,114.81 180 bottom
JP198  SPI  [1X04]  144.02,114.81 180 bottom
JP199  SMA_EDGE  [SMA-EDGE]  159.66,107.85 90 top
JP200  AUX  [1X04]  144.02,99.57 180 bottom
JP201  MISC  [1X04]  133.86,99.57 180 bottom
JP202  FIDUCIALUFIDUCIAL  [MICRO-FIDUCIAL]  157.99,99.57 0 top
JP203  FIDUCIALUFIDUCIAL  [MICRO-FIDUCIAL]  135.13,112.78 0 top
JP204  MAIN  [1X04]  175.77,114.81 180 bottom
JP205  SPI  [1X04]  185.93,114.81 180 bottom
JP206  SMA_EDGE  [SMA-EDGE]  201.57,107.85 90 top
JP207  AUX  [1X04]  185.93,99.57 180 bottom
JP208  MISC  [1X04]  175.77,99.57 180 bottom
JP209  FIDUCIALUFIDUCIAL  [MICRO-FIDUCIAL]  199.9,99.57 0 top
JP210  FIDUCIALUFIDUCIAL  [MICRO-FIDUCIAL]  177.04,112.78 0 top
L1  33nH  [C0402]  30.7,22.78 270 top
L2  33nH  [C0402]  72.61,22.78 270 top
L3  33nH  [C0402]  114.52,22.78 270 top
L4  33nH  [C0402]  156.43,22.78 270 top
L5  33nH  [C0402]  198.34,22.78 270 top
L6  33nH  [C0402]  30.7,41.07 270 top
L7  33nH  [C0402]  72.61,41.07 270 top
L8  33nH  [C0402]  114.52,41.07 270 top
L9  33nH  [C0402]  156.43,41.07 270 top
L10  33nH  [C0402]  198.34,41.07 270 top
L11  33nH  [C0402]  30.7,59.36 270 top
L12  33nH  [C0402]  72.61,59.36 270 top
L13  33nH  [C0402]  114.52,59.36 270 top
L14  33nH  [C0402]  156.43,59.36 270 top
L15  33nH  [C0402]  198.34,59.36 270 top
L16  33nH  [C0402]  30.7,77.65 270 top
L17  33nH  [C0402]  72.61,77.65 270 top
L18  33nH  [C0402]  114.52,77.65 270 top
L19  33nH  [C0402]  156.43,77.65 270 top
L20  33nH  [C0402]  198.34,77.65 270 top
L21  33nH  [C0402]  30.7,95.94 270 top
L22  33nH  [C0402]  72.61,95.94 270 top
L23  33nH  [C0402]  114.52,95.94 270 top
L24  33nH  [C0402]  156.43,95.94 270 top
L25  33nH  [C0402]  198.34,95.94 270 top
L26  33nH  [C0402]  30.7,114.22 270 top
L27  33nH  [C0402]  72.61,114.22 270 top
L28  33nH  [C0402]  114.52,114.22 270 top
L29  33nH  [C0402]  156.43,114.22 270 top
L30  33nH  [C0402]  198.34,114.22 270 top
LED1  Red  [LED-0603]  13.21,15.75 180 top
LED2  Red  [LED-0603]  55.12,15.75 180 top
LED3  Red  [LED-0603]  97.03,15.75 180 top
LED4  Red  [LED-0603]  138.94,15.75 180 top
LED5  Red  [LED-0603]  180.85,15.75 180 top
LED6  Red  [LED-0603]  13.21,34.04 180 top
LED7  Red  [LED-0603]  55.12,34.04 180 top
LED8  Red  [LED-0603]  97.03,34.04 180 top
LED9  Red  [LED-0603]  138.94,34.04 180 top
LED10  Red  [LED-0603]  180.85,34.04 180 top
LED11  Red  [LED-0603]  13.21,52.32 180 top
LED12  Red  [LED-0603]  55.12,52.32 180 top
LED13  Red  [LED-0603]  97.03,52.32 180 top
LED14  Red  [LED-0603]  138.94,52.32 180 top
LED15  Red  [LED-0603]  180.85,52.32 180 top
LED16  Red  [LED-0603]  13.21,70.61 180 top
LED17  Red  [LED-0603]  55.12,70.61 180 top
LED18  Red  [LED-0603]  97.03,70.61 180 top
LED19  Red  [LED-0603]  138.94,70.61 180 top
LED20  Red  [LED-0603]  180.85,70.61 180 top
LED21  Red  [LED-0603]  13.21,88.9 180 top
LED22  Red  [LED-0603]  55.12,88.9 180 top
LED23  Red  [LED-0603]  97.03,88.9 180 top
LED24  Red  [LED-0603]  138.94,88.9 180 top
LED25  Red  [LED-0603]  180.85,88.9 180 top
LED26  Red  [LED-0603]  13.21,107.19 180 top
LED27  Red  [LED-0603]  55.12,107.19 180 top
LED28  Red  [LED-0603]  97.03,107.19 180 top
LED29  Red  [LED-0603]  138.94,107.19 180 top
LED30  Red  [LED-0603]  180.85,107.19 180 top
LOGO1  LOGO-SFESK  [SFE-LOGO-FLAME]  31.62,12.57 270 top
LOGO2  LOGO-SFESK  [SFE-LOGO-FLAME]  17.69,15.15 0 bottom
LOGO3  LOGO-SFENW2  [SFE-NEW-WEB]  30.35,14.48 0 bottom
LOGO4  LOGO-SFESK  [SFE-LOGO-FLAME]  59.6,15.15 0 bottom
LOGO5  LOGO-SFENW2  [SFE-NEW-WEB]  72.26,14.48 0 bottom
LOGO6  LOGO-SFESK  [SFE-LOGO-FLAME]  73.53,12.57 270 top
LOGO7  LOGO-SFESK  [SFE-LOGO-FLAME]  101.51,15.15 0 bottom
LOGO8  LOGO-SFENW2  [SFE-NEW-WEB]  114.17,14.48 0 bottom
LOGO9  LOGO-SFESK  [SFE-LOGO-FLAME]  115.44,12.57 270 top
LOGO10  LOGO-SFESK  [SFE-LOGO-FLAME]  143.42,15.15 0 bottom
LOGO11  LOGO-SFENW2  [SFE-NEW-WEB]  156.08,14.48 0 bottom
LOGO12  LOGO-SFESK  [SFE-LOGO-FLAME]  157.35,12.57 270 top
LOGO13  LOGO-SFESK  [SFE-LOGO-FLAME]  185.33,15.15 0 bottom
LOGO14  LOGO-SFENW2  [SFE-NEW-WEB]  197.99,14.48 0 bottom
LOGO15  LOGO-SFESK  [SFE-LOGO-FLAME]  199.26,12.57 270 top
LOGO16  LOGO-SFESK  [SFE-LOGO-FLAME]  17.69,33.44 0 bottom
LOGO17  LOGO-SFENW2  [SFE-NEW-WEB]  30.35,32.77 0 bottom
LOGO18  LOGO-SFESK  [SFE-LOGO-FLAME]  31.62,30.86 270 top
LOGO19  LOGO-SFESK  [SFE-LOGO-FLAME]  59.6,33.44 0 bottom
LOGO20  LOGO-SFENW2  [SFE-NEW-WEB]  72.26,32.77 0 bottom
LOGO21  LOGO-SFESK  [SFE-LOGO-FLAME]  73.53,30.86 270 top
LOGO22  LOGO-SFESK  [SFE-LOGO-FLAME]  101.51,33.44 0 bottom
LOGO23  LOGO-SFENW2  [SFE-NEW-WEB]  114.17,32.77 0 bottom
LOGO24  LOGO-SFESK  [SFE-LOGO-FLAME]  115.44,30.86 270 top
LOGO25  LOGO-SFESK  [SFE-LOGO-FLAME]  143.42,33.44 0 bottom
LOGO26  LOGO-SFENW2  [SFE-NEW-WEB]  156.08,32.77 0 bottom
LOGO27  LOGO-SFESK  [SFE-LOGO-FLAME]  157.35,30.86 270 top
LOGO28  LOGO-SFESK  [SFE-LOGO-FLAME]  185.33,33.44 0 bottom
LOGO29  LOGO-SFENW2  [SFE-NEW-WEB]  197.99,32.77 0 bottom
LOGO30  LOGO-SFESK  [SFE-LOGO-FLAME]  199.26,30.86 270 top
LOGO31  LOGO-SFESK  [SFE-LOGO-FLAME]  17.69,51.73 0 bottom
LOGO32  LOGO-SFENW2  [SFE-NEW-WEB]  30.35,51.05 0 bottom
LOGO33  LOGO-SFESK  [SFE-LOGO-FLAME]  31.62,49.15 270 top
LOGO34  LOGO-SFESK  [SFE-LOGO-FLAME]  59.6,51.73 0 bottom
LOGO35  LOGO-SFENW2  [SFE-NEW-WEB]  72.26,51.05 0 bottom
LOGO36  LOGO-SFESK  [SFE-LOGO-FLAME]  73.53,49.15 270 top
LOGO37  LOGO-SFESK  [SFE-LOGO-FLAME]  101.51,51.73 0 bottom
LOGO38  LOGO-SFENW2  [SFE-NEW-WEB]  114.17,51.05 0 bottom
LOGO39  LOGO-SFESK  [SFE-LOGO-FLAME]  115.44,49.15 270 top
LOGO40  LOGO-SFESK  [SFE-LOGO-FLAME]  143.42,51.73 0 bottom
LOGO41  LOGO-SFENW2  [SFE-NEW-WEB]  156.08,51.05 0 bottom
LOGO42  LOGO-SFESK  [SFE-LOGO-FLAME]  157.35,49.15 270 top
LOGO43  LOGO-SFESK  [SFE-LOGO-FLAME]  185.33,51.73 0 bottom
LOGO44  LOGO-SFENW2  [SFE-NEW-WEB]  197.99,51.05 0 bottom
LOGO45  LOGO-SFESK  [SFE-LOGO-FLAME]  199.26,49.15 270 top
LOGO46  LOGO-SFESK  [SFE-LOGO-FLAME]  17.69,70.02 0 bottom
LOGO47  LOGO-SFENW2  [SFE-NEW-WEB]  30.35,69.34 0 bottom
LOGO48  LOGO-SFESK  [SFE-LOGO-FLAME]  31.62,67.44 270 top
LOGO49  LOGO-SFESK  [SFE-LOGO-FLAME]  59.6,70.02 0 bottom
LOGO50  LOGO-SFENW2  [SFE-NEW-WEB]  72.26,69.34 0 bottom
LOGO51  LOGO-SFESK  [SFE-LOGO-FLAME]  73.53,67.44 270 top
LOGO52  LOGO-SFESK  [SFE-LOGO-FLAME]  101.51,70.02 0 bottom
LOGO53  LOGO-SFENW2  [SFE-NEW-WEB]  114.17,69.34 0 bottom
LOGO54  LOGO-SFESK  [SFE-LOGO-FLAME]  115.44,67.44 270 top
LOGO55  LOGO-SFESK  [SFE-LOGO-FLAME]  143.42,70.02 0 bottom
LOGO56  LOGO-SFENW2  [SFE-NEW-WEB]  156.08,69.34 0 bottom
LOGO57  LOGO-SFESK  [SFE-LOGO-FLAME]  157.35,67.44 270 top
LOGO58  LOGO-SFESK  [SFE-LOGO-FLAME]  185.33,70.02 0 bottom
LOGO59  LOGO-SFENW2  [SFE-NEW-WEB]  197.99,69.34 0 bottom
LOGO60  LOGO-SFESK  [SFE-LOGO-FLAME]  199.26,67.44 270 top
LOGO61  LOGO-SFESK  [SFE-LOGO-FLAME]  17.69,88.3 0 bottom
LOGO62  LOGO-SFENW2  [SFE-NEW-WEB]  30.35,87.63 0 bottom
LOGO63  LOGO-SFESK  [SFE-LOGO-FLAME]  31.62,85.72 270 top
LOGO64  LOGO-SFESK  [SFE-LOGO-FLAME]  59.6,88.3 0 bottom
LOGO65  LOGO-SFENW2  [SFE-NEW-WEB]  72.26,87.63 0 bottom
LOGO66  LOGO-SFESK  [SFE-LOGO-FLAME]  73.53,85.72 270 top
LOGO67  LOGO-SFESK  [SFE-LOGO-FLAME]  101.51,88.3 0 bottom
LOGO68  LOGO-SFENW2  [SFE-NEW-WEB]  114.17,87.63 0 bottom
LOGO69  LOGO-SFESK  [SFE-LOGO-FLAME]  115.44,85.72 270 top
LOGO70  LOGO-SFESK  [SFE-LOGO-FLAME]  143.42,88.3 0 bottom
LOGO71  LOGO-SFENW2  [SFE-NEW-WEB]  156.08,87.63 0 bottom
LOGO72  LOGO-SFESK  [SFE-LOGO-FLAME]  157.35,85.72 270 top
LOGO73  LOGO-SFESK  [SFE-LOGO-FLAME]  185.33,88.3 0 bottom
LOGO74  LOGO-SFENW2  [SFE-NEW-WEB]  197.99,87.63 0 bottom
LOGO75  LOGO-SFESK  [SFE-LOGO-FLAME]  199.26,85.72 270 top
LOGO76  LOGO-SFESK  [SFE-LOGO-FLAME]  17.69,106.59 0 bottom
LOGO77  LOGO-SFENW2  [SFE-NEW-WEB]  30.35,105.92 0 bottom
LOGO78  LOGO-SFESK  [SFE-LOGO-FLAME]  31.62,104.01 270 top
LOGO79  LOGO-SFESK  [SFE-LOGO-FLAME]  59.6,106.59 0 bottom
LOGO80  LOGO-SFENW2  [SFE-NEW-WEB]  72.26,105.92 0 bottom
LOGO81  LOGO-SFESK  [SFE-LOGO-FLAME]  73.53,104.01 270 top
LOGO82  LOGO-SFESK  [SFE-LOGO-FLAME]  101.51,106.59 0 bottom
LOGO83  LOGO-SFENW2  [SFE-NEW-WEB]  114.17,105.92 0 bottom
LOGO84  LOGO-SFESK  [SFE-LOGO-FLAME]  115.44,104.01 270 top
LOGO85  LOGO-SFESK  [SFE-LOGO-FLAME]  143.42,106.59 0 bottom
LOGO86  LOGO-SFENW2  [SFE-NEW-WEB]  156.08,105.92 0 bottom
LOGO87  LOGO-SFESK  [SFE-LOGO-FLAME]  157.35,104.01 270 top
LOGO88  LOGO-SFESK  [SFE-LOGO-FLAME]  185.33,106.59 0 bottom
LOGO89  LOGO-SFENW2  [SFE-NEW-WEB]  197.99,105.92 0 bottom
LOGO90  LOGO-SFESK  [SFE-LOGO-FLAME]  199.26,104.01 270 top
R1  33k  [0402-RES]  17.34,20.51 270 top
R2  10k  [0402-RES]  16.38,11.3 0 top
R3  330  [0402-RES]  13.21,10.83 270 top
R4  330  [0402-RES]  16.38,12.9 0 top
R5  33k  [0402-RES]  59.25,20.51 270 top
R6  10K  [0402-RES]  14.8,20.51 90 top
R7  0  [GND-JUMP]  27.5,18.95 180 bottom
R8  10k  [0402-RES]  58.29,11.3 0 top
R9  330  [0402-RES]  58.29,12.9 0 top
R10  0  [GND-JUMP]  69.41,18.95 180 bottom
R11  330  [0402-RES]  55.12,10.83 270 top
R12  10K  [0402-RES]  56.71,20.51 90 top
R13  33k  [0402-RES]  101.16,20.51 270 top
R14  10k  [0402-RES]  100.2,11.3 0 top
R15  330  [0402-RES]  100.2,12.9 0 top
R16  0  [GND-JUMP]  111.32,18.95 180 bottom
R17  330  [0402-RES]  97.03,10.83 270 top
R18  10K  [0402-RES]  98.62,20.51 90 top
R19  33k  [0402-RES]  143.07,20.51 270 top
R20  10k  [0402-RES]  142.11,11.3 0 top
R21  330  [0402-RES]  142.11,12.9 0 top
R22  0  [GND-JUMP]  153.23,18.95 180 bottom
R23  330  [0402-RES]  138.94,10.83 270 top
R24  10K  [0402-RES]  140.53,20.51 90 top
R25  33k  [0402-RES]  184.98,20.51 270 top
R26  10k  [0402-RES]  184.02,11.3 0 top
R27  330  [0402-RES]  184.02,12.9 0 top
R28  0  [GND-JUMP]  195.14,18.95 180 bottom
R29  330  [0402-RES]  180.85,10.83 270 top
R30  10K  [0402-RES]  182.44,20.51 90 top
R31  33k  [0402-RES]  17.34,38.8 270 top
R32  10k  [0402-RES]  16.38,29.59 0 top
R33  330  [0402-RES]  16.38,31.19 0 top
R34  0  [GND-JUMP]  27.5,37.24 180 bottom
R35  330  [0402-RES]  13.21,29.11 270 top
R36  10K  [0402-RES]  14.8,38.8 90 top
R37  33k  [0402-RES]  59.25,38.8 270 top
R38  10k  [0402-RES]  58.29,29.59 0 top
R39  330  [0402-RES]  58.29,31.19 0 top
R40  0  [GND-JUMP]  69.41,37.24 180 bottom
R41  330  [0402-RES]  55.12,29.11 270 top
R42  10K  [0402-RES]  56.71,38.8 90 top
R43  33k  [0402-RES]  101.16,38.8 270 top
R44  10k  [0402-RES]  100.2,29.59 0 top
R45  330  [0402-RES]  100.2,31.19 0 top
R46  0  [GND-JUMP]  111.32,37.24 180 bottom
R47  330  [0402-RES]  97.03,29.11 270 top
R48  10K  [0402-RES]  98.62,38.8 90 top
R49  33k  [0402-RES]  143.07,38.8 270 top
R50  10k  [0402-RES]  142.11,29.59 0 top
R51  330  [0402-RES]  142.11,31.19 0 top
R52  0  [GND-JUMP]  153.23,37.24 180 bottom
R53  330  [0402-RES]  138.94,29.11 270 top
R54  10K  [0402-RES]  140.53,38.8 90 top
R55  33k  [0402-RES]  184.98,38.8 270 top
R56  10k  [0402-RES]  184.02,29.59 0 top
R57  330  [0402-RES]  184.02,31.19 0 top
R58  0  [GND-JUMP]  195.14,37.24 180 bottom
R59  330  [0402-RES]  180.85,29.11 270 top
R60  10K  [0402-RES]  182.44,38.8 90 top
R61  33k  [0402-RES]  17.34,57.09 270 top
R62  10k  [0402-RES]  16.38,47.88 0 top
R63  330  [0402-RES]  16.38,49.48 0 top
R64  0  [GND-JUMP]  27.5,55.52 180 bottom
R65  330  [0402-RES]  13.21,47.4 270 top
R66  10K  [0402-RES]  14.8,57.09 90 top
R67  33k  [0402-RES]  59.25,57.09 270 top
R68  10k  [0402-RES]  58.29,47.88 0 top
R69  330  [0402-RES]  58.29,49.48 0 top
R70  0  [GND-JUMP]  69.41,55.52 180 bottom
R71  330  [0402-RES]  55.12,47.4 270 top
R72  10K  [0402-RES]  56.71,57.09 90 top
R73  33k  [0402-RES]  101.16,57.09 270 top
R74  10k  [0402-RES]  100.2,47.88 0 top
R75  330  [0402-RES]  100.2,49.48 0 top
R76  0  [GND-JUMP]  111.32,55.52 180 bottom
R77  330  [0402-RES]  97.03,47.4 270 top
R78  10K  [0402-RES]  98.62,57.09 90 top
R79  33k  [0402-RES]  143.07,57.09 270 top
R80  10k  [0402-RES]  142.11,47.88 0 top
R81  330  [0402-RES]  142.11,49.48 0 top
R82  0  [GND-JUMP]  153.23,55.52 180 bottom
R83  330  [0402-RES]  138.94,47.4 270 top
R84  10K  [0402-RES]  140.53,57.09 90 top
R85  33k  [0402-RES]  184.98,57.09 270 top
R86  10k  [0402-RES]  184.02,47.88 0 top
R87  330  [0402-RES]  184.02,49.48 0 top
R88  0  [GND-JUMP]  195.14,55.52 180 bottom
R89  330  [0402-RES]  180.85,47.4 270 top
R90  10K  [0402-RES]  182.44,57.09 90 top
R91  33k  [0402-RES]  17.34,75.37 270 top
R92  10k  [0402-RES]  16.38,66.17 0 top
R93  330  [0402-RES]  16.38,67.77 0 top
R94  0  [GND-JUMP]  27.5,73.81 180 bottom
R95  330  [0402-RES]  13.21,65.69 270 top
R96  10K  [0402-RES]  14.8,75.37 90 top
R97  33k  [0402-RES]  59.25,75.37 270 top
R98  10k  [0402-RES]  58.29,66.17 0 top
R99  330  [0402-RES]  58.29,67.77 0 top
R100  0  [GND-JUMP]  69.41,73.81 180 bottom
R101  330  [0402-RES]  55.12,65.69 270 top
R102  10K  [0402-RES]  56.71,75.37 90 top
R103  33k  [0402-RES]  101.16,75.37 270 top
R104  10k  [0402-RES]  100.2,66.17 0 top
R105  330  [0402-RES]  100.2,67.77 0 top
R106  0  [GND-JUMP]  111.32,73.81 180 bottom
R107  330  [0402-RES]  97.03,65.69 270 top
R108  10K  [0402-RES]  98.62,75.37 90 top
R109  33k  [0402-RES]  143.07,75.37 270 top
R110  10k  [0402-RES]  142.11,66.17 0 top
R111  330  [0402-RES]  142.11,67.77 0 top
R112  0  [GND-JUMP]  153.23,73.81 180 bottom
R113  330  [0402-RES]  138.94,65.69 270 top
R114  10K  [0402-RES]  140.53,75.37 90 top
R115  33k  [0402-RES]  184.98,75.37 270 top
R116  10k  [0402-RES]  184.02,66.17 0 top
R117  330  [0402-RES]  184.02,67.77 0 top
R118  0  [GND-JUMP]  195.14,73.81 180 bottom
R119  330  [0402-RES]  180.85,65.69 270 top
R120  10K  [0402-RES]  182.44,75.37 90 top
R121  33k  [0402-RES]  17.34,93.66 270 top
R122  10k  [0402-RES]  16.38,84.45 0 top
R123  330  [0402-RES]  16.38,86.06 0 top
R124  0  [GND-JUMP]  27.5,92.1 180 bottom
R125  330  [0402-RES]  13.21,83.98 270 top
R126  10K  [0402-RES]  14.8,93.66 90 top
R127  33k  [0402-RES]  59.25,93.66 270 top
R128  10k  [0402-RES]  58.29,84.45 0 top
R129  330  [0402-RES]  58.29,86.06 0 top
R130  0  [GND-JUMP]  69.41,92.1 180 bottom
R131  330  [0402-RES]  55.12,83.98 270 top
R132  10K  [0402-RES]  56.71,93.66 90 top
R133  33k  [0402-RES]  101.16,93.66 270 top
R134  10k  [0402-RES]  100.2,84.45 0 top
R135  330  [0402-RES]  100.2,86.06 0 top
R136  0  [GND-JUMP]  111.32,92.1 180 bottom
R137  330  [0402-RES]  97.03,83.98 270 top
R138  10K  [0402-RES]  98.62,93.66 90 top
R139  33k  [0402-RES]  143.07,93.66 270 top
R140  10k  [0402-RES]  142.11,84.45 0 top
R141  330  [0402-RES]  142.11,86.06 0 top
R142  0  [GND-JUMP]  153.23,92.1 180 bottom
R143  330  [0402-RES]  138.94,83.98 270 top
R144  10K  [0402-RES]  140.53,93.66 90 top
R145  33k  [0402-RES]  184.98,93.66 270 top
R146  10k  [0402-RES]  184.02,84.45 0 top
R147  330  [0402-RES]  184.02,86.06 0 top
R148  0  [GND-JUMP]  195.14,92.1 180 bottom
R149  330  [0402-RES]  180.85,83.98 270 top
R150  10K  [0402-RES]  182.44,93.66 90 top
R151  33k  [0402-RES]  17.34,111.95 270 top
R152  10k  [0402-RES]  16.38,102.74 0 top
R153  330  [0402-RES]  16.38,104.34 0 top
R154  0  [GND-JUMP]  27.5,110.39 180 bottom
R155  330  [0402-RES]  13.21,102.27 270 top
R156  10K  [0402-RES]  14.8,111.95 90 top
R157  33k  [0402-RES]  59.25,111.95 270 top
R158  10k  [0402-RES]  58.29,102.74 0 top
R159  330  [0402-RES]  58.29,104.34 0 top
R160  0  [GND-JUMP]  69.41,110.39 180 bottom
R161  330  [0402-RES]  55.12,102.27 270 top
R162  10K  [0402-RES]  56.71,111.95 90 top
R163  33k  [0402-RES]  101.16,111.95 270 top
R164  10k  [0402-RES]  100.2,102.74 0 top
R165  330  [0402-RES]  100.2,104.34 0 top
R166  0  [GND-JUMP]  111.32,110.39 180 bottom
R167  330  [0402-RES]  97.03,102.27 270 top
R168  10K  [0402-RES]  98.62,111.95 90 top
R169  33k  [0402-RES]  143.07,111.95 270 top
R170  10k  [0402-RES]  142.11,102.74 0 top
R171  330  [0402-RES]  142.11,104.34 0 top
R172  0  [GND-JUMP]  153.23,110.39 180 bottom
R173  330  [0402-RES]  138.94,102.27 270 top
R174  10K  [0402-RES]  140.53,111.95 90 top
R175  33k  [0402-RES]  184.98,111.95 270 top
R176  10k  [0402-RES]  184.02,102.74 0 top
R177  330  [0402-RES]  184.02,104.34 0 top
R178  0  [GND-JUMP]  195.14,110.39 180 bottom
R179  330  [0402-RES]  180.85,102.27 270 top
R180  10K  [0402-RES]  182.44,111.95 90 top
SJ1  BTS  [SJ_3_PASTE2&3]  9.4,15.11 90 top
SJ2  PSE  [SJ_3_PASTE2&3]  9.4,18.92 270 top
SJ3  BAT  [SJ_2S]  9.4,11.78 270 top
SJ4  BTS  [SJ_3_PASTE2&3]  51.31,15.11 90 top
SJ5  PSE  [SJ_3_PASTE2&3]  51.31,18.92 270 top
SJ6  BAT  [SJ_2S]  51.31,11.78 270 top
SJ7  BTS  [SJ_3_PASTE2&3]  93.22,15.11 90 top
SJ8  PSE  [SJ_3_PASTE2&3]  93.22,18.92 270 top
SJ9  BAT  [SJ_2S]  93.22,11.78 270 top
SJ10  BTS  [SJ_3_PASTE2&3]  135.13,15.11 90 top
SJ11  PSE  [SJ_3_PASTE2&3]  135.13,18.92 270 top
SJ12  BAT  [SJ_2S]  135.13,11.78 270 top
SJ13  BTS  [SJ_3_PASTE2&3]  177.04,15.11 90 top
SJ14  PSE  [SJ_3_PASTE2&3]  177.04,18.92 270 top
SJ15  BAT  [SJ_2S]  177.04,11.78 270 top
SJ16  BTS  [SJ_3_PASTE2&3]  9.4,33.4 90 top
SJ17  PSE  [SJ_3_PASTE2&3]  9.4,37.21 270 top
SJ18  BAT  [SJ_2S]  9.4,30.07 270 top
SJ19  BTS  [SJ_3_PASTE2&3]  51.31,33.4 90 top
SJ20  PSE  [SJ_3_PASTE2&3]  51.31,37.21 270 top
SJ21  BAT  [SJ_2S]  51.31,30.07 270 top
SJ22  BTS  [SJ_3_PASTE2&3]  93.22,33.4 90 top
SJ23  PSE  [SJ_3_PASTE2&3]  93.22,37.21 270 top
SJ24  BAT  [SJ_2S]  93.22,30.07 270 top
SJ25  BTS  [SJ_3_PASTE2&3]  135.13,33.4 90 top
SJ26  PSE  [SJ_3_PASTE2&3]  135.13,37.21 270 top
SJ27  BAT  [SJ_2S]  135.13,30.07 270 top
SJ28  BTS  [SJ_3_PASTE2&3]  177.04,33.4 90 top
SJ29  PSE  [SJ_3_PASTE2&3]  177.04,37.21 270 top
SJ30  BAT  [SJ_2S]  177.04,30.07 270 top
SJ31  BTS  [SJ_3_PASTE2&3]  9.4,51.69 90 top
SJ32  PSE  [SJ_3_PASTE2&3]  9.4,55.5 270 top
SJ33  BAT  [SJ_2S]  9.4,48.36 270 top
SJ34  BTS  [SJ_3_PASTE2&3]  51.31,51.69 90 top
SJ35  PSE  [SJ_3_PASTE2&3]  51.31,55.5 270 top
SJ36  BAT  [SJ_2S]  51.31,48.36 270 top
SJ37  BTS  [SJ_3_PASTE2&3]  93.22,51.69 90 top
SJ38  PSE  [SJ_3_PASTE2&3]  93.22,55.5 270 top
SJ39  BAT  [SJ_2S]  93.22,48.36 270 top
SJ40  BTS  [SJ_3_PASTE2&3]  135.13,51.69 90 top
SJ41  PSE  [SJ_3_PASTE2&3]  135.13,55.5 270 top
SJ42  BAT  [SJ_2S]  135.13,48.36 270 top
SJ43  BTS  [SJ_3_PASTE2&3]  177.04,51.69 90 top
SJ44  PSE  [SJ_3_PASTE2&3]  177.04,55.5 270 top
SJ45  BAT  [SJ_2S]  177.04,48.36 270 top
SJ46  BTS  [SJ_3_PASTE2&3]  9.4,69.98 90 top
SJ47  PSE  [SJ_3_PASTE2&3]  9.4,73.79 270 top
SJ48  BAT  [SJ_2S]  9.4,66.64 270 top
SJ49  BTS  [SJ_3_PASTE2&3]  51.31,69.98 90 top
SJ50  PSE  [SJ_3_PASTE2&3]  51.31,73.79 270 top
SJ51  BAT  [SJ_2S]  51.31,66.64 270 top
SJ52  BTS  [SJ_3_PASTE2&3]  93.22,69.98 90 top
SJ53  PSE  [SJ_3_PASTE2&3]  93.22,73.79 270 top
SJ54  BAT  [SJ_2S]  93.22,66.64 270 top
SJ55  BTS  [SJ_3_PASTE2&3]  135.13,69.98 90 top
SJ56  PSE  [SJ_3_PASTE2&3]  135.13,73.79 270 top
SJ57  BAT  [SJ_2S]  135.13,66.64 270 top
SJ58  BTS  [SJ_3_PASTE2&3]  177.04,69.98 90 top
SJ59  PSE  [SJ_3_PASTE2&3]  177.04,73.79 270 top
SJ60  BAT  [SJ_2S]  177.04,66.64 270 top
SJ61  BTS  [SJ_3_PASTE2&3]  9.4,88.27 90 top
SJ62  PSE  [SJ_3_PASTE2&3]  9.4,92.08 270 top
SJ63  BAT  [SJ_2S]  9.4,84.93 270 top
SJ64  BTS  [SJ_3_PASTE2&3]  51.31,88.27 90 top
SJ65  PSE  [SJ_3_PASTE2&3]  51.31,92.08 270 top
SJ66  BAT  [SJ_2S]  51.31,84.93 270 top
SJ67  BTS  [SJ_3_PASTE2&3]  93.22,88.27 90 top
SJ68  PSE  [SJ_3_PASTE2&3]  93.22,92.08 270 top
SJ69  BAT  [SJ_2S]  93.22,84.93 270 top
SJ70  BTS  [SJ_3_PASTE2&3]  135.13,88.27 90 top
SJ71  PSE  [SJ_3_PASTE2&3]  135.13,92.08 270 top
SJ72  BAT  [SJ_2S]  135.13,84.93 270 top
SJ73  BTS  [SJ_3_PASTE2&3]  177.04,88.27 90 top
SJ74  PSE  [SJ_3_PASTE2&3]  177.04,92.08 270 top
SJ75  BAT  [SJ_2S]  177.04,84.93 270 top
SJ76  BTS  [SJ_3_PASTE2&3]  9.4,106.55 90 top
SJ77  PSE  [SJ_3_PASTE2&3]  9.4,110.36 270 top
SJ78  BAT  [SJ_2S]  9.4,103.22 270 top
SJ79  BTS  [SJ_3_PASTE2&3]  51.31,106.55 90 top
SJ80  PSE  [SJ_3_PASTE2&3]  51.31,110.36 270 top
SJ81  BAT  [SJ_2S]  51.31,103.22 270 top
SJ82  BTS  [SJ_3_PASTE2&3]  93.22,106.55 90 top
SJ83  PSE  [SJ_3_PASTE2&3]  93.22,110.36 270 top
SJ84  BAT  [SJ_2S]  93.22,103.22 270 top
SJ85  BTS  [SJ_3_PASTE2&3]  135.13,106.55 90 top
SJ86  PSE  [SJ_3_PASTE2&3]  135.13,110.36 270 top
SJ87  BAT  [SJ_2S]  135.13,103.22 270 top
SJ88  BTS  [SJ_3_PASTE2&3]  177.04,106.55 90 top
SJ89  PSE  [SJ_3_PASTE2&3]  177.04,110.36 270 top
SJ90  BAT  [SJ_2S]  177.04,103.22 270 top
U1  VENUS638FLPX-L  [VENUS638FLPX]  24.64,15.75 0 top
U2  VENUS638FLPX-L  [VENUS638FLPX]  66.55,15.75 0 top
U3  VENUS638FLPX-L  [VENUS638FLPX]  108.46,15.75 0 top
U4  VENUS638FLPX-L  [VENUS638FLPX]  150.37,15.75 0 top
U5  VENUS638FLPX-L  [VENUS638FLPX]  192.28,15.75 0 top
U6  VENUS638FLPX-L  [VENUS638FLPX]  24.64,34.04 0 top
U7  VENUS638FLPX-L  [VENUS638FLPX]  66.55,34.04 0 top
U8  VENUS638FLPX-L  [VENUS638FLPX]  108.46,34.04 0 top
U9  VENUS638FLPX-L  [VENUS638FLPX]  150.37,34.04 0 top
U10  VENUS638FLPX-L  [VENUS638FLPX]  192.28,34.04 0 top
U11  VENUS638FLPX-L  [VENUS638FLPX]  24.64,52.32 0 top
U12  VENUS638FLPX-L  [VENUS638FLPX]  66.55,52.32 0 top
U13  VENUS638FLPX-L  [VENUS638FLPX]  108.46,52.32 0 top
U14  VENUS638FLPX-L  [VENUS638FLPX]  150.37,52.32 0 top
U15  VENUS638FLPX-L  [VENUS638FLPX]  192.28,52.32 0 top
U16  VENUS638FLPX-L  [VENUS638FLPX]  24.64,70.61 0 top
U17  VENUS638FLPX-L  [VENUS638FLPX]  66.55,70.61 0 top
U18  VENUS638FLPX-L  [VENUS638FLPX]  108.46,70.61 0 top
U19  VENUS638FLPX-L  [VENUS638FLPX]  150.37,70.61 0 top
U20  VENUS638FLPX-L  [VENUS638FLPX]  192.28,70.61 0 top
U21  VENUS638FLPX-L  [VENUS638FLPX]  24.64,88.9 0 top
U22  VENUS638FLPX-L  [VENUS638FLPX]  66.55,88.9 0 top
U23  VENUS638FLPX-L  [VENUS638FLPX]  108.46,88.9 0 top
U24  VENUS638FLPX-L  [VENUS638FLPX]  150.37,88.9 0 top
U25  VENUS638FLPX-L  [VENUS638FLPX]  192.28,88.9 0 top
U26  VENUS638FLPX-L  [VENUS638FLPX]  24.64,107.19 0 top
U27  VENUS638FLPX-L  [VENUS638FLPX]  66.55,107.19 0 top
U28  VENUS638FLPX-L  [VENUS638FLPX]  108.46,107.19 0 top
U29  VENUS638FLPX-L  [VENUS638FLPX]  150.37,107.19 0 top
U30  VENUS638FLPX-L  [VENUS638FLPX]  192.28,107.19 0 top
U$1  OSHW-LOGOS  [OSHW-LOGO-S]  73.53,10.67 0 bottom
U$2  OSHW-LOGOS  [OSHW-LOGO-S]  115.44,10.67 0 bottom
U$3  OSHW-LOGOS  [OSHW-LOGO-S]  157.35,10.67 0 bottom
U$4  OSHW-LOGOS  [OSHW-LOGO-S]  31.62,10.67 0 bottom
U$5  OSHW-LOGOS  [OSHW-LOGO-S]  199.26,10.67 0 bottom
U$6  OSHW-LOGOS  [OSHW-LOGO-S]  31.62,28.96 0 bottom
U$7  OSHW-LOGOS  [OSHW-LOGO-S]  73.53,28.96 0 bottom
U$8  OSHW-LOGOS  [OSHW-LOGO-S]  115.44,28.96 0 bottom
U$9  OSHW-LOGOS  [OSHW-LOGO-S]  157.35,28.96 0 bottom
U$10  OSHW-LOGOS  [OSHW-LOGO-S]  199.26,28.96 0 bottom
U$11  OSHW-LOGOS  [OSHW-LOGO-S]  31.62,47.24 0 bottom
U$12  OSHW-LOGOS  [OSHW-LOGO-S]  73.53,47.24 0 bottom
U$13  OSHW-LOGOS  [OSHW-LOGO-S]  115.44,47.24 0 bottom
U$14  OSHW-LOGOS  [OSHW-LOGO-S]  157.35,47.24 0 bottom
U$15  OSHW-LOGOS  [OSHW-LOGO-S]  199.26,47.24 0 bottom
U$16  OSHW-LOGOS  [OSHW-LOGO-S]  31.62,65.53 0 bottom
U$17  OSHW-LOGOS  [OSHW-LOGO-S]  73.53,65.53 0 bottom
U$18  OSHW-LOGOS  [OSHW-LOGO-S]  115.44,65.53 0 bottom
U$19  OSHW-LOGOS  [OSHW-LOGO-S]  157.35,65.53 0 bottom
U$20  OSHW-LOGOS  [OSHW-LOGO-S]  199.26,65.53 0 bottom
U$21  OSHW-LOGOS  [OSHW-LOGO-S]  31.62,83.82 0 bottom
U$22  OSHW-LOGOS  [OSHW-LOGO-S]  73.53,83.82 0 bottom
U$23  OSHW-LOGOS  [OSHW-LOGO-S]  115.44,83.82 0 bottom
U$24  OSHW-LOGOS  [OSHW-LOGO-S]  157.35,83.82 0 bottom
U$25  OSHW-LOGOS  [OSHW-LOGO-S]  199.26,83.82 0 bottom
U$26  OSHW-LOGOS  [OSHW-LOGO-S]  31.62,102.11 0 bottom
U$27  OSHW-LOGOS  [OSHW-LOGO-S]  73.53,102.11 0 bottom
U$28  OSHW-LOGOS  [OSHW-LOGO-S]  115.44,102.11 0 bottom
U$29  OSHW-LOGOS  [OSHW-LOGO-S]  157.35,102.11 0 bottom
U$30  OSHW-LOGOS  [OSHW-LOGO-S]  199.26,102.11 0 bottom

## Library data of the parts
C1-C180 D1-D30 JP1-JP210 L1-L30 LED1-LED30 LOGO1-LOGO90 R1-R6 R8 R9 R11-R15 R17-R21 R23-R27 R29-R33 R35-R39 R41-R45 R47-R51 R53-R57 R59-R63 R65-R69 R71-R75 R77-R81 R83-R87 R89-R93 R95-R99 R101-R105 R107-R111 R113-R117 R119-R123 R125-R129 R131-R135 R137-R141 R143-R147 R149-R153 R155-R159 R161-R165 R167-R171 R173-R177 R179 R180 SJ1-SJ90 U$1-U$30 = SparkFun
E$1 = SparkFun-Retired
E$3 E$4 = SparkFun-Aesthetics
R7 R10 R16 R22 R28 R34 R40 R46 R52 R58 R64 R70 R76 R82 R88 R94 R100 R106 R112 R118 R124 R130 R136 R142 R148 R154 R160 R166 R172 R178 U1-U30 = mike-temp